# Altium PCB SW-TH_SSSU011700_2021-01-09.pcbdoc
Units mm, origin at the board's own origin, x right, y up, seen from the top; angles counter-clockwise.
Board outline 47.53 x 32.91 mm, 2 copper layers (Top Layer, Bottom Layer); 1 components, 2 nets, 5 pads, 0 vias.
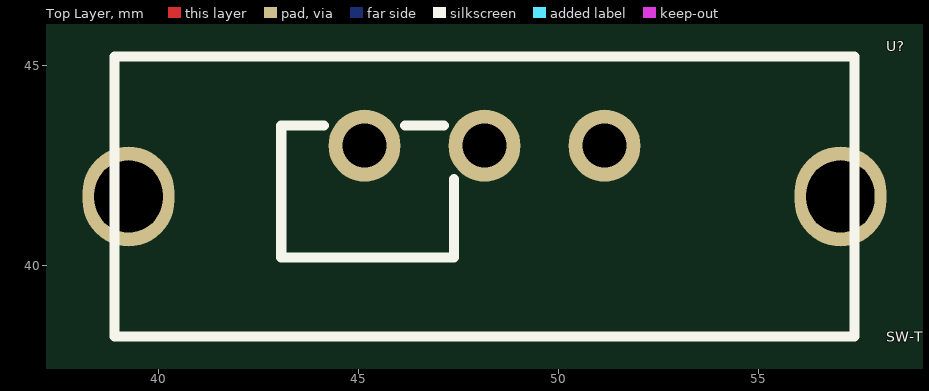
[diagram p0: Top Layer view]
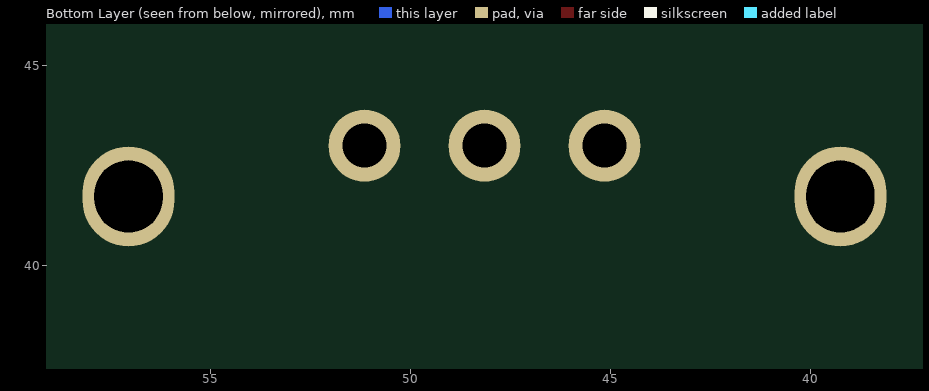
[diagram p1: Bottom Layer view, seen from below]

## Layer stack, top to bottom
Top Layer: signal copper (thickness not stored)
Dielectric: dielectric 0.32, FR-4, Dk 4.8
Bottom Layer: signal copper (thickness not stored)

## Board outline
72.932,25.4 25.4,25.4 25.4,58.308 72.932,58.308

## Components (designator, comment, footprint, x,y, rotation, side; value= is the part's Value field where it differs from the comment)
U? "SW-TH_SSSU011700" SW-TH_SSSU011700 48.15,41.727 r0 top

## Footprints (in the part's own frame and the unit in brackets; to place one, negate y for a bottom-side part, rotate by r counter-clockwise, add the part's x,y. Pads: shape width x height; smd on the part's side, far side on the other; paste and mask are expansions set on the pad)
SW-TH_SSSU011700 [mm]
  round 1.8 hole 1.1: 1(-3,1.27) 2(0,1.27) 3(3,1.27)
  oval 2.3x2.5 hole 1.7 slot 1.8 at 90 deg: 4(8.9,0) 5(-8.9,0)
  silkscreen extent -9.25,-3.5 9.25,3.5

## Nets (pads, with @x,y where several pads share a name; then routed paths per layer and width w, separated by ;. In a path a pad name is that pad's centre, name@x,y a point inside that pad or via, vN(x,y) a via of type N, cw(c..) or ccw(c..) an arc to the next point about the centre after c; other vN are vias at no path point)
S$39: 
S$41: 
pads on no net: U?.1 U?.2 U?.3 U?.4 U?.5

## Silkscreen, mask and mechanical layers (free items; w line width, h text height)
Document:
  lines w0.003: 49.141,41.829 49.191,41.879